# Altium PCB mpa32iadapt.PcbDoc
Units mm, origin at the board's own origin, x right, y up, seen from the top; angles counter-clockwise.
Board outline 50.16 x 25.15 mm, 2 copper layers (Top Layer, Bottom Layer); 2 components, 34 nets, 72 pads, 0 vias.
Unrouted connection lines stored in the file: 38.
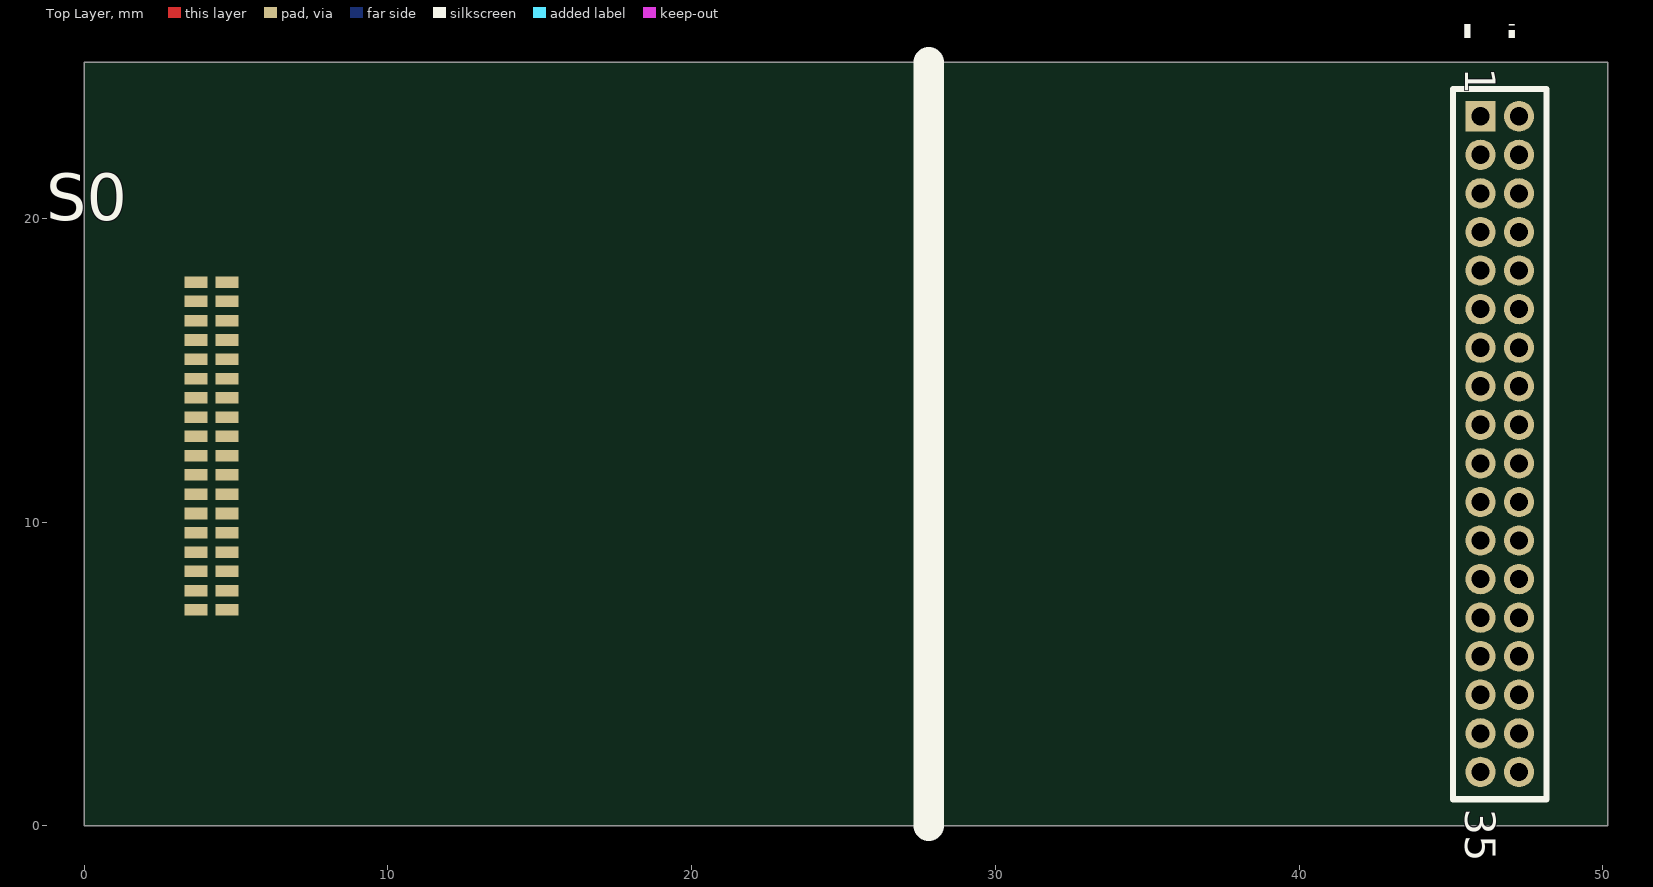
[diagram p0: Top Layer view]
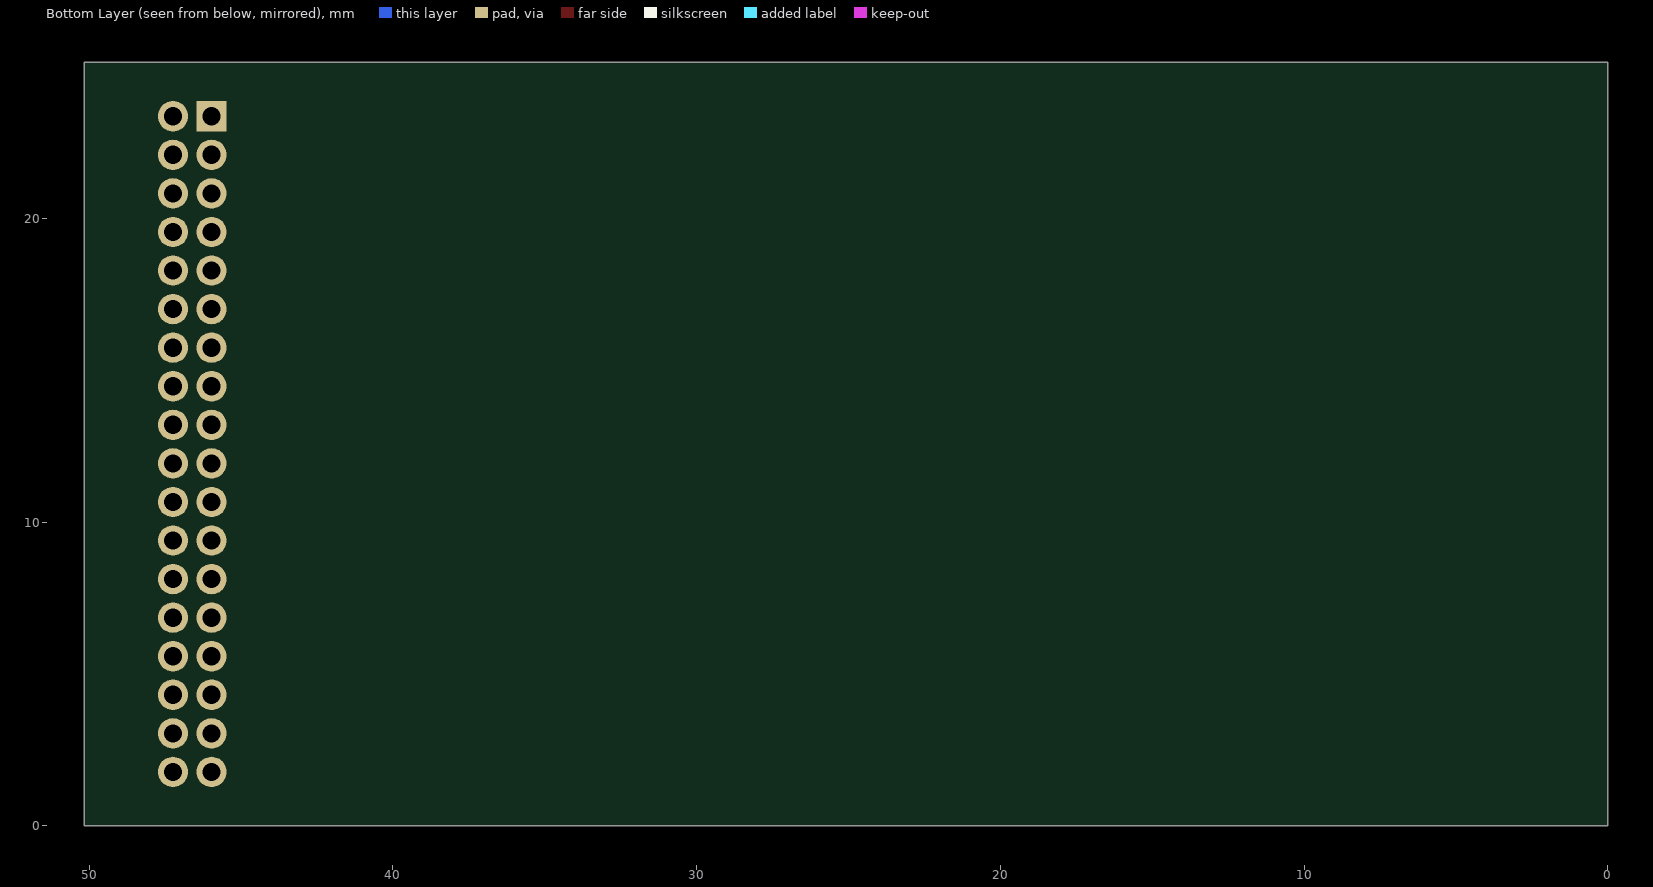
[diagram p1: Bottom Layer view, seen from below]

## Layer stack, top to bottom
Top Solder: solder mask 0.0102, Solder Resist, Dk 3.5
Top Layer: signal copper 0.0356
Dielectric 1: dielectric 0.32, FR-4, Dk 4.8
Bottom Layer: signal copper 0.0356
Bottom Solder: solder mask 0.0102, Solder Resist, Dk 3.5

## Board outline
0,0 50.165,0 50.165,25.146 0,25.146

## Design rules (kind name [scope] priority, off if disabled: settings)
Clearance [All] p1: gap=0.254 ignorepadtopadclearanceinfootprint=FALSE except(0: Arc-Hole Track-Hole SMDPad-Hole THPad-Hole Via-Hole Fill-Hole Poly-Hole Region-Hole Text-Hole)
PolygonConnect [All] p1: connectstyle=Relief reliefconductorwidth=0.254 reliefentries=4 polygonreliefangle="90 Angle" airgapwidth=0.254
RoomDefinition mpa32iadapt [InComponentClass('mpa32iadapt')] p1: confinementstyle=ConfineIn formatcopy=TRUE lockcomponents=FALSE outline -25.4,-25.4 25.4,-25.4 25.4,0 -25.4,0
RoutingVias [All] p1: holewidth=0.711 width=1.27 viastyle="Through Hole" minholewidth=0.711 minwidth=1.27 maxholewidth=0.711 maxwidth=1.27
SolderMaskExpansion [All] p1: expansion=0.102
Width [All] p1: maxlimit=0.254 minlimit=0.254 preferedwidth=0.254
30 further rules are at their usual default settings.

## Components (designator, comment, footprint, x,y, rotation, side; value= is the part's Value field where it differs from the comment)
P? "MHDR2X18" MHDR2X18 45.974,23.368 r270 top
S0 "Omnetics A79024 36-pin connector" OMNETICS_A79024 2.972,12.509 r270 top

## Footprints (in the part's own frame and the unit in brackets; to place one, negate y for a bottom-side part, rotate by r counter-clockwise, add the part's x,y. Pads: shape width x height; smd on the part's side, far side on the other; paste and mask are expansions set on the pad)
MHDR2X18 [mm] "Connector; Header; 18x2 Position"
  rect 1x1 hole 0.6: 1(0,0)
  round 1 hole 0.6: 2(0,1.27) 3(1.27,0) 4(1.27,1.27) 5(2.54,0) 6(2.54,1.27) 7(3.81,0) 8(3.81,1.27) 9(5.08,0) 10(5.08,1.27) 11(6.35,0) 12(6.35,1.27) 13(7.62,0) 14(7.62,1.27) 15(8.89,0) 16(8.89,1.27) 17(10.16,0) 18(10.16,1.27) 19(11.43,0) 20(11.43,1.27) 21(12.7,0) 22(12.7,1.27) 23(13.97,0) 24(13.97,1.27) 25(15.24,0) 26(15.24,1.27) 27(16.51,0) 28(16.51,1.27) 29(17.78,0) 30(17.78,1.27) 31(19.05,0) 32(19.05,1.27) 33(20.32,0) 34(20.32,1.27) 35(21.59,0) 36(21.59,1.27)
  silkscreen extent -0.9,-0.9 22.49,2.17, body extent -0.84,-0.15 22.43,7.43, height 3.1
OMNETICS_A79024 [mil]
  rect 15x30 smd: B1(-212.5,28) B2(-187.5,28) B3(-162.5,28) B4(-137.5,28) B5(-112.5,28) B6(-87.5,28) B7(-62.5,28) B8(-37.5,28) B9(-12.5,28) B10(12.5,28) B11(37.5,28) B12(62.5,28) B13(87.5,28) B14(112.5,28) B15(137.5,28) B16(162.5,28) B17(187.5,28) B18(212.5,28) T1(-212.5,68) T2(-187.5,68) T3(-162.5,68) T4(-137.5,68) T5(-112.5,68) T6(-87.5,68) T7(-62.5,68) T8(-37.5,68) T9(-12.5,68) T10(12.5,68) T11(37.5,68) T12(62.5,68) T13(87.5,68) T14(112.5,68) T15(137.5,68) T16(162.5,68) T17(187.5,68) T18(212.5,68)
  body extent -257,-213 258,80, height 66

## Part data
P?: "Header, 18-Pin, Dual row", LatestRevisionDate=17-Jul-2002, LatestRevisionNote="Re-released for DXP Platform.", Publisher="Altium Limited"
S0: library part OMNETICS_A79024, DeviceSetName=OMNETICS_A79024, GateName_1=A, LibraryName=RHD2000_eval_board, Package=OMNETICS_A79024, SymbolName_1=OMNETICS_A7902X

## Nets (pads, with @x,y where several pads share a name; then routed paths per layer and width w, separated by ;. In a path a pad name is that pad's centre, name@x,y a point inside that pad or via, vN(x,y) a via of type N, cw(c..) or ccw(c..) an arc to the next point about the centre after c; other vN are vias at no path point)
GND: P?.1 P?.36 S0.B1 S0.T18
NetP?_3: P?.3 S0.B2
NetP?_5: P?.5 S0.B3
NetP?_7: P?.7 S0.B4
NetP?_9: P?.9 S0.B5
NetP?_11: P?.11 S0.B6
NetP?_13: P?.13 S0.B7
NetP?_15: P?.15 S0.B8
NetP?_17: P?.17 S0.B9
NetP?_19: P?.19 S0.B10
NetP?_21: P?.21 S0.B11
NetP?_23: P?.23 S0.B12
NetP?_25: P?.25 S0.B13
NetP?_27: P?.27 S0.B14
NetP?_29: P?.29 S0.B15
NetP?_31: P?.31 S0.B16
NetP?_33: P?.33 S0.B17
REF: P?.2 P?.35 S0.B18 S0.T1
s_0: P?.4 S0.T17
s_1: P?.6 S0.T16
s_2: P?.8 S0.T15
s_3: P?.10 S0.T14
s_4: P?.12 S0.T13
s_5: P?.14 S0.T12
s_6: P?.16 S0.T11
s_7: P?.18 S0.T10
s_8: P?.20 S0.T9
s_9: P?.22 S0.T8
s_10: P?.24 S0.T7
s_11: P?.26 S0.T6
s_12: P?.28 S0.T5
s_13: P?.30 S0.T4
s_14: P?.32 S0.T3
s_15: P?.34 S0.T2

## Silkscreen, mask and mechanical layers (free items; w line width, h text height)
Top Overlay:
  lines w1: 27.813,0 27.813,25.146

## Text inside footprints (layer, text, board x,y; h text height)
P?: Top Overlay "1" at 45.466,24.968 h1 r270; Top Overlay "35" at 45.473,0.568 h1 r270